# Altium PCB Quadruple_7_Seg_Disp.PcbDoc
Units mm, origin at the board's own origin, x right, y up, seen from the top; angles counter-clockwise.
Board outline 83.82 x 39.88 mm, 2 copper layers (Top Layer, Bottom Layer); 29 components, 37 nets, 137 pads, 0 vias.
Unrouted connection lines stored in the file: 64.
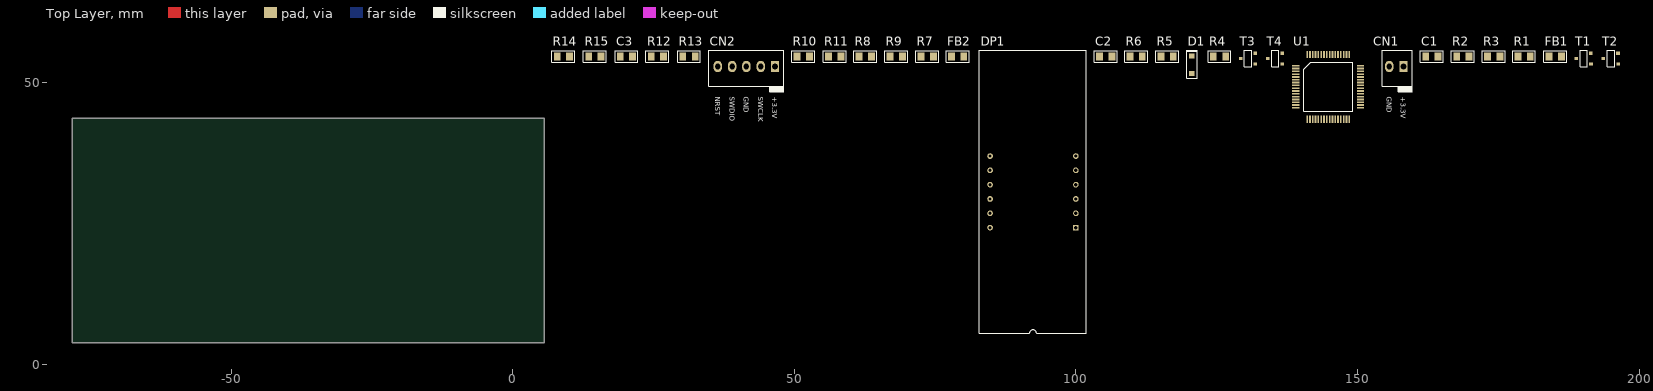
[diagram p0: Top Layer view]
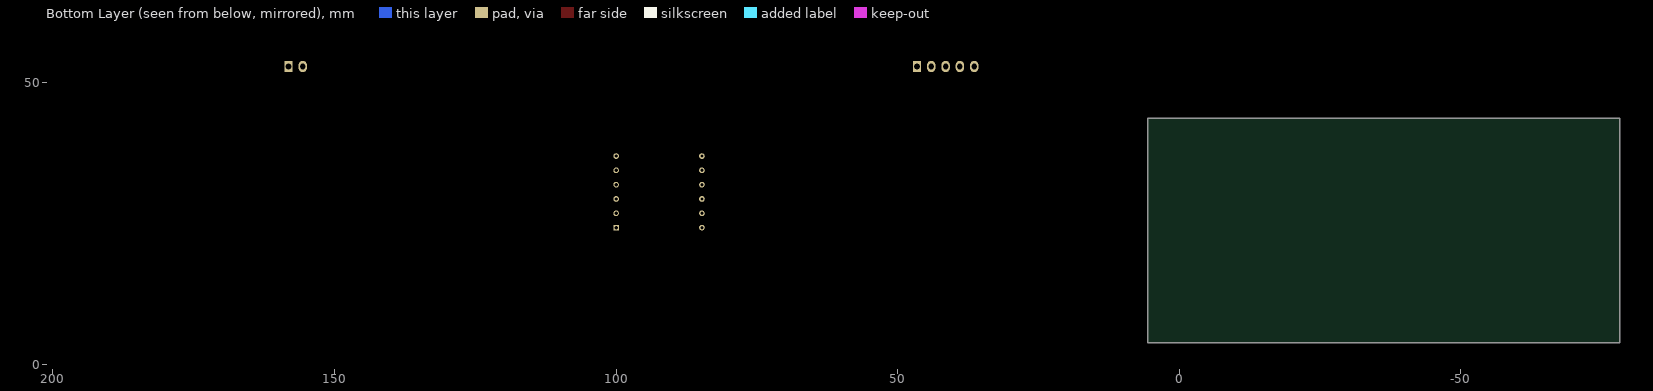
[diagram p1: Bottom Layer view, seen from below]

## Layer stack, top to bottom
Top Solder: solder mask 0.0102, Solder Resist, Dk 3.5
Top Layer: signal copper 0.0356
Dielectric 1: dielectric 0.32, FR-4, Dk 4.8
Bottom Layer: signal copper 0.0356
Bottom Solder: solder mask 0.0102, Solder Resist, Dk 3.5

## Board outline
5.6,3.823 5.6,43.701 -78.22,43.701 -78.22,3.823

## Design rules (kind name [scope] priority, off if disabled: settings)
Clearance [All] p1: gap=0.254 ignorepadtopadclearanceinfootprint=FALSE except(0: Arc-Hole Track-Hole SMDPad-Hole THPad-Hole Via-Hole Fill-Hole Poly-Hole Region-Hole Text-Hole)
PolygonConnect [All] p1: connectstyle=Relief reliefconductorwidth=0.254 reliefentries=4 polygonreliefangle="90 Angle" airgapwidth=0.254
RoutingVias [All] p1: holewidth=0.3 width=0.7 viastyle="Through Hole" minholewidth=0.3 minwidth=0.7 maxholewidth=0.3 maxwidth=0.7
SolderMaskExpansion [All] p1: expansion=0.102
Width [All] p1: maxlimit=1 minlimit=0.25 preferedwidth=0.5
30 further rules are at their usual default settings.

## Components (designator, comment, footprint, x,y, rotation, side; value= is the part's Value field where it differs from the comment)
C1 "100uF/50V" "Capacitor 0805" 163.199,54.678 r0 top
C2 "10nF/50V" "Capacitor 0805" 105.3,54.678 r0 top
C3 "4.7uF/16V" "Capacitor 0805 4.7uF" 20.2,54.678 r0 top
CN1 "PCMC2-02 - Alimentação +3V3" "Header Male Horizontal 2X1" 156.899,52.878 r0 top
CN2 "PCMC2-05 - Gravacao STM32" "Header Macho Horizontal 5x1 - Gravacao STM32" 41.5,52.878 r0 top
D1 "1N4148W-TP" SOD123 120.6,53.178 r90 top
DP1 "LDQ-N516RI" LDQ-N516RI 100,24.278 r90 top
FB1 "1A" "Ferrite 0805" 185.099,54.678 r0 top
FB2 "1A" "Ferrite 0805" 79,54.678 r0 top
R1 "100k" "RESISTOR 0805 100K" 179.599,54.678 r0 top
R2 "10k" "RESISTOR 0805 10K" 168.699,54.678 r0 top
R3 "10k" "RESISTOR 0805 10K" 174.199,54.678 r0 top
R4 "47K" "Resistor 0805 47k" 125.5,54.678 r0 top
R5 "10k" "RESISTOR 0805 10K" 116.2,54.678 r0 top
R6 "10k" "RESISTOR 0805 10K" 110.7,54.678 r0 top
R7 "220k" "Resistor 0805 220k" 73.6,54.678 r0 top
R8 "220R" "Resistor 0805 220R" 62.6,54.678 r0 top
R9 "220R" "Resistor 0805 220R" 68.1,54.678 r0 top
R10 "220R" "Resistor 0805 220R" 51.6,54.678 r0 top
R11 "220R" "Resistor 0805 220R" 57.2,54.678 r0 top
R12 "220R" "Resistor 0805 220R" 25.7,54.678 r0 top
R13 "220R" "Resistor 0805 220R" 31.3,54.678 r0 top
R14 "220R" "Resistor 0805 220R" 9,54.678 r0 top
R15 "220R" "Resistor 0805 220R" 14.6,54.678 r0 top
T1 "BC847" SOT-23 188.899,54.778 r0 top
T2 "BC847" SOT-23 193.699,54.778 r0 top
T3 "BC847" SOT-23 129.3,54.778 r0 top
T4 "BC847" SOT-23 134.1,54.778 r0 top
U1 "STM32F411RET6" LQFP64 144.799,49.278 r0 top

## Footprints (in the part's own frame and the unit in brackets; to place one, negate y for a bottom-side part, rotate by r counter-clockwise, add the part's x,y. Pads: shape width x height; smd on the part's side, far side on the other; paste and mask are expansions set on the pad)
"Capacitor 0805" [mm]
  rect 1.2x1.4 smd: 1(-1.1,0) 2(1.1,0)
  silkscreen extent -2.02,-1.02 2.02,1.02, body extent -1,-0.62 1,0.63, height 0.6
"Capacitor 0805 4.7uF" [mm]
  rect 1.2x1.4 smd: 1(-1.1,0) 2(1.1,0)
  silkscreen extent -2.02,-1.03 2.03,1.02, body extent -1.07,-0.7 1.13,0.75, height 1.4
"Ferrite 0805" [mm]
  rect 1.2x1.4 smd: 1(-1.1,0) 2(1.1,0)
  silkscreen extent -2.02,-1.02 2.02,1.02, body extent -1.28,-0.62 1.23,0.63, height 0.8
"Header Macho Horizontal 5x1 - Gravacao STM32" [mm] "Header Macho Horizontal 5x1 - Gravacao STM32"
  rect 1.5x2 hole 1: 1(5.08,0)
  oval 1.5x2 hole 1: 2(2.54,0) 3(0,0) 4(-2.54,0) 5(-5.08,0)
  silkscreen extent -6.65,-4.48 6.65,2.87, body extent -6.35,-3.2 6.35,2.6, height 11.53
"Header Male Horizontal 2X1" [mm]
  rect 1.5x2 hole 1: 1(1.27,0)
  oval 1.5x2 hole 1: 2(-1.27,0)
  silkscreen extent -2.54,-4.48 2.84,2.87, body extent -2.57,-3.2 2.51,2.6, height 11.6
LDQ-N516RI [mm]
  rect 1x1 hole 0.6: 1(0,0)
  round 1 hole 0.6: 2(2.54,0) 3(5.08,0) 4(7.62,0) 5(10.16,0) 6(12.7,0) 7(12.7,15.24) 8(10.16,15.24) 9(7.62,15.24) 10(5.08,15.24) 11(2.54,15.24) 12(0,15.24)
  silkscreen extent -18.8,-1.88 31.5,17.12, body extent -18.8,-1.88 31.5,17.12, height 8
LQFP64 [mm]
  rect 1.276x0.3 smd: 1(-5.75,3.75) 2(-5.75,3.25) 3(-5.75,2.75) 4(-5.75,2.25) 5(-5.75,1.75) 6(-5.75,1.25) 7(-5.75,0.75) 8(-5.75,0.25) 9(-5.75,-0.25) 10(-5.75,-0.75) 11(-5.75,-1.25) 12(-5.75,-1.75) 13(-5.75,-2.25) 14(-5.75,-2.75) 15(-5.75,-3.25) 16(-5.75,-3.75) 33(5.75,-3.75) 34(5.75,-3.25) 35(5.75,-2.75) 36(5.75,-2.25) 37(5.75,-1.75) 38(5.75,-1.25) 39(5.75,-0.75) 40(5.75,-0.25) 41(5.75,0.25) 42(5.75,0.75) 43(5.75,1.25) 44(5.75,1.75) 45(5.75,2.25) 46(5.75,2.75) 47(5.75,3.25) 48(5.75,3.75)
  rect 0.3x1.276 smd: 17(-3.75,-5.75) 18(-3.25,-5.75) 19(-2.75,-5.75) 20(-2.25,-5.75) 21(-1.75,-5.75) 22(-1.25,-5.75) 23(-0.75,-5.75) 24(-0.25,-5.75) 25(0.25,-5.75) 26(0.75,-5.75) 27(1.25,-5.75) 28(1.75,-5.75) 29(2.25,-5.75) 30(2.75,-5.75) 31(3.25,-5.75) 32(3.75,-5.75) 49(3.75,5.75) 50(3.25,5.75) 51(2.75,5.75) 52(2.25,5.75) 53(1.75,5.75) 54(1.25,5.75) 55(0.75,5.75) 56(0.25,5.75) 57(-0.25,5.75) 58(-0.75,5.75) 59(-1.25,5.75) 60(-1.75,5.75) 61(-2.25,5.75) 62(-2.75,5.75) 63(-3.25,5.75) 64(-3.75,5.75)
  silkscreen extent -4.31,-4.31 4.31,4.31, body extent -6.01,-6.01 5.99,5.99, height 8.6
"RESISTOR 0805 10K" [mm]
  rect 1.2x1.4 smd: 1(-1.1,0) 2(1.1,0)
  silkscreen extent -2.03,-1.02 2.02,1.02, body extent -0.97,-0.62 1.03,0.63, height 0.61
"Resistor 0805 47k" [mm]
  rect 1.2x1.4 smd: 1(-1.1,0) 2(1.1,0)
  silkscreen extent -2.02,-1.02 2.02,1.02, body extent -1,-0.62 1,0.63, height 0.51
"RESISTOR 0805 100K" [mm]
  rect 1.2x1.4 smd: 1(-1.125,0) 2(1.075,0)
  silkscreen extent -2.05,-1.02 2,1.03, body extent -1.03,-0.62 0.97,0.63, height 0.61
"Resistor 0805 220k" [mm]
  rect 1.2x1.4 smd: 1(-1.1,0) 2(1.1,0)
  silkscreen extent -2.02,-1.02 2.02,1.02, body extent -1,-0.62 1,0.63, height 0.51
"Resistor 0805 220R" [mm]
  rect 1.2x1.4 smd: 1(-1.1,0) 2(1.1,0)
  silkscreen extent -2.03,-1.03 2.02,1.02, body extent -1,-0.62 1,0.63, height 0.61
SOD123 [mm]
  rect 0.9x0.95 smd: 1(-1.575,0) 2(1.575,0)
  silkscreen extent -2.35,-0.95 2.6,0.95, body extent -1.85,-0.8 1.85,0.8, height 1.28
SOT-23 [mm]
  rect 0.65x0.55 smd: B(2.565,-1.422) C(-0.051,-0.508) E(2.54,0.457)
  silkscreen extent 0.64,-1.98 1.93,1.02, body extent 0.04,-1.98 2.54,1.02, height 1.09

## Part data
C1: library part CC0805MRX7R9BB104, "Cap Ceramic 0.1uF 50V X7R 20% SMD 0805 125C Paper T/R", Capacitance=100nF, Case/Package=0805, Dielectric=X7R, Manufacturer=Yageo, Max Operating Temperature=125°C, Min Operating Temperature=-55°C, Supplier Part Number 1=311-4351-1-ND, Tolerance=20%, Voltage Rating=50V, ComponentLink1Description=https://datasheet.ciiva.com/13207/upy-gphc-x7r-6-3v-to-50v-8-12304-13207535.pdf?src-supplier=Mouser, ComponentLink1URL=https://datasheet.ciiva.com/13207/upy-gphc-x7r-6-3v-to-50v-8-12304-13207535.pdf?src-supplier=Mouser, Depth=1.25mm, Halogen Free="Halogen Free", Lead Free="Lead Free", Length=0.079inch, Manufacturer Part Number=CC0805MRX7R9BB104, Mount="Surface Mount", Packaging="Tape and Reel", Pricing 1="1 = 0,16000, 10 = 0,11400, 50 = 0,06460, 100 = 0,05350, 500 = 0,03754, 1000 = 0,03108 (USD)", RoHS=Yes, Stock 1=3755, Supplier 1=Digi-Key, Thickness=0.037inch, Voltage Rating (DC)=50V, Width=0.049inch
C2: library part C0805X103F5GEC7210, "Cap Cer 0805 10NF 50V C0G 1%", Manufacturer=KEMET, Supplier Part Number 1=C0805X103F5GEC7210-ND, Manufacturer Part Number=C0805X103F5GEC7210, Pricing 1="10000 = 0,10290 (USD)", Stock 1=0, Supplier 1=Digi-Key
C3: library part C0805C475M4PACTU, "Multilayer Ceramic Capacitors MLCC - SMD/SMT 16volts 4.7uF X5R 20%", Capacitance=4.7uF, Case/Package=0805, Case Code (Metric)=2012, Dielectric=X5R, Dielectric Material=Ceramic, Manufacturer=KEMET, Max Operating Temperature=85°C, Min Operating Temperature=-55°C, Package Quantity=1, Supplier Part Number 1=399-9249-1-ND, Tolerance=20%, Voltage Rating=16V, Case Code (Imperial)=0805, ComponentLink1Description=http://components.arrow.com/part/dataview/40912695S6999520N7429?src-supplier=Arrow, ComponentLink1URL=http://components.arrow.com/part/dataview/40912695S6999520N7429?src-supplier=Arrow, ComponentLink2Description=http://www.mouser.com/ds/2/212/KEM_C1006_X5R_SMD-1103249.pdf?src-supplier=Mouser, ComponentLink2URL=http://www.mouser.com/ds/2/212/KEM_C1006_X5R_SMD-1103249.pdf?src-supplier=Mouser, ComponentLink3Description=https://search.kemet.com/component-edge/download/datasheet/C0805C475M4PACTU.pdf?src-supplier=Digi-Key, ComponentLink3URL=https://search.kemet.com/component-edge/download/datasheet/C0805C475M4PACTU.pdf?src-supplier=Digi-Key, ComponentLink4Description=https://api.kemet.com/component-edge/download/datasheet/C0805C475M4PACTU.pdf?src-supplier=Digi-Key, ComponentLink4URL=https://api.kemet.com/component-edge/download/datasheet/C0805C475M4PACTU.pdf?src-supplier=Digi-Key, Depth=1.25mm, Dissipation Factor=5%, Height=1.25mm, Lead Free="Lead Free", Lead Pitch=0.75mm, Length=2mm, Manufacturer Part Number=C0805C475M4PACTU, Mount="Surface Mount", Packaging="Tape and Reel", Pricing 1="1 = 0,54000, 10 = 0,37800, 50 = 0,26460, 100 = 0,22690, 500 = 0,17016, 1000 = 0,14369 (USD)", RoHS=Yes, Stock 1=4513, Supplier 1=Digi-Key, Termination=SMD/SMT, Thickness=0.055inch, Voltage Rating (DC)=16V, Width=0.049inch
D1: "MICRO COMMERCIAL COMPONENTS - 1N4148W-TP - SWITCHING DIODE, 150mA, 100V, SOD123, FU", Average Rectified Current=150mA, Capacitance=4pF, Forward Voltage=1V, Manufacturer=MCC, Max Forward Surge Current (Ifsm)=1A, Max Operating Temperature=150°C, Max Repetitive Reverse Voltage (Vrrm)=100V, Max Reverse Leakage Current=5uA, Max Surge Current=2A, Min Operating Temperature=-65°C, Package Quantity=3000, Power Dissipation=400mW, Supplier Part Number 1=1N4148WTPMSCT-ND, ComponentLink1Description=https://datasheet.ciiva.com/16836/1n4148wsod123-16836277.pdf?src-supplier=Future+Electronics, ComponentLink1URL=https://datasheet.ciiva.com/16836/1n4148wsod123-16836277.pdf?src-supplier=Future+Electronics, ComponentLink2Description=https://datasheet.ciiva.com/1243/1684829-1243908.pdf?src-supplier=Newark, ComponentLink2URL=https://datasheet.ciiva.com/1243/1684829-1243908.pdf?src-supplier=Newark, ComponentLink3Description=https://datasheet.ciiva.com/4435/1n4148wsod123-48460-4435223.pdf?src-supplier=Mouser, ComponentLink3URL=https://datasheet.ciiva.com/4435/1n4148wsod123-48460-4435223.pdf?src-supplier=Mouser, ComponentLink4Description=https://datasheet.ciiva.com/911/1n4148wsod123-911676.pdf?src-supplier=Digi-Key, ComponentLink4URL=https://datasheet.ciiva.com/911/1n4148wsod123-911676.pdf?src-supplier=Digi-Key, ComponentLink5Description=https://datasheet.ciiva.com/911/1n4148wsod123-911677.pdf?src-supplier=Digi-Key, ComponentLink5URL=https://datasheet.ciiva.com/911/1n4148wsod123-911677.pdf?src-supplier=Digi-Key, ComponentLink6Description=https://datasheet.ciiva.com/22747/1684829-22747439.pdf?src-supplier=Element14, ComponentLink6URL=https://datasheet.ciiva.com/22747/1684829-22747439.pdf?src-supplier=Element14, ComponentLink7Description=https://datasheet.ciiva.com/14557/70055519-14557767.pdf?src-supplier=Allied+Electronics, ComponentLink7URL=https://datasheet.ciiva.com/14557/70055519-14557767.pdf?src-supplier=Allied+Electronics, ComponentLink8Description=https://datasheet.ciiva.com/7622/1684829-7622556.pdf?src-supplier=Element14, ComponentLink8URL=https://datasheet.ciiva.com/7622/1684829-7622556.pdf?src-supplier=Element14, ComponentLink9Description=https://datasheet.ciiva.com/911/1n4148wsod123-911678.pdf?src-supplier=Digi-Key, ComponentLink9URL=https://datasheet.ciiva.com/911/1n4148wsod123-911678.pdf?src-supplier=Digi-Key, ComponentLink10Description=http://datasheet.octopart.com/1N4148W-TP-Micro-Commercial-datasheet-60845.pdf?src-supplier=Element14, ComponentLink10URL=http://datasheet.octopart.com/1N4148W-TP-Micro-Commercial-datasheet-60845.pdf?src-supplier=Element14, ComponentLink11Description=http://datasheet.octopart.com/1N4148W-TP-Micro-Commercial-datasheet-13551187.pdf?src-supplier=Upverter, ComponentLink11URL=http://datasheet.octopart.com/1N4148W-TP-Micro-Commercial-datasheet-13551187.pdf?src-supplier=Upverter, ComponentLink12Description=http://datasheet.octopart.com/1N4148W-TP-MCC-datasheet-8327246.pdf?src-supplier=Future+Electronics, ComponentLink12URL=http://datasheet.octopart.com/1N4148W-TP-MCC-datasheet-8327246.pdf?src-supplier=Future+Electronics, ComponentLink13Description=http://datasheet.octopart.com/1N4148W-TP-MCC-datasheet-124568.pdf?src-supplier=Future+Electronics, ComponentLink13URL=http://datasheet.octopart.com/1N4148W-TP-MCC-datasheet-124568.pdf?src-supplier=Future+Electronics, ComponentLink14Description=http://datasheet.octopart.com/1N4148W-TP-MCC-datasheet-10003094.pdf?src-supplier=Allied+Electronics, ComponentLink14URL=http://datasheet.octopart.com/1N4148W-TP-MCC-datasheet-10003094.pdf?src-supplier=Allied+Electronics, ComponentLink15Description=http://datasheet.octopart.com/1N4148W-TP-Micro-Commercial-datasheet-11773887.pdf?src-supplier=Arrow, ComponentLink15URL=http://datasheet.octopart.com/1N4148W-TP-Micro-Commercial-datasheet-11773887.pdf?src-supplier=Arrow, ComponentLink16Description=http://datasheet.octopart.com/1N4148W-TP-MCC-datasheet-133511570.pdf?src-supplier=Future+Electronics, ComponentLink16URL=http://datasheet.octopart.com/1N4148W-TP-MCC-datasheet-133511570.pdf?src-supplier=Future+Electronics, ComponentLink17Description=http://datasheet.octopart.com/1N4148W-TP-MCC-datasheet-134792309.pdf?src-supplier=TME, ComponentLink17URL=http://datasheet.octopart.com/1N4148W-TP-MCC-datasheet-134792309.pdf?src-supplier=TME, Current Rating=150mA, Element Configuration=Single, Forward Current=150mA, Height=1.2mm, Lead Free="Lead Free", Length=2.85mm, Manufacturer Part Number=1N4148W-TP, Max Reverse Voltage (DC)=100V, Mount="Surface Mount", Number of Pins=2, Output Current=150mA, Packaging="Tape and Reel", Peak Non-Repetitive Surge Current=2A, Polarity=Standard, Pricing 1="1 = 0,17000, 10 = 0,15800, 25 = 0,15000, 100 = 0,06600, 250 = 0,06336, 500 = 0,05184, 1000 = 0,03600 (USD)", Radiation Hardening=No, REACH SVHC=Unknown, Recovery Time=4ns, Reverse Recovery Time=4ns, Stock 1=11901, Supplier 1=Digi-Key, Voltage Rating (DC)=100V, Width=1.8mm
DP1: "DISPLAY, 7 SEGMENT, RED, 14MM", Color=Red, Forward Current=30mA, Forward Voltage=1.8V, Manufacturer=Lumex, Max Operating Temperature=85°C, Max Power Dissipation=100mW, Min Operating Temperature=-20°C, Package Quantity=10, Supplier Part Number 1=67-1450-ND, Test Current=10mA, ComponentLink1Description=https://datasheet.ciiva.com/1316/269248-1316417.pdf?src-supplier=Newark, ComponentLink1URL=https://datasheet.ciiva.com/1316/269248-1316417.pdf?src-supplier=Newark, ComponentLink2Description=https://datasheet.ciiva.com/2103/ldq-n516ri-2103905.pdf?src-supplier=Digi-Key, ComponentLink2URL=https://datasheet.ciiva.com/2103/ldq-n516ri-2103905.pdf?src-supplier=Digi-Key, ComponentLink3Description=https://datasheet.ciiva.com/4421/ldq-n516ri-107399-4421791.pdf?src-supplier=Mouser, ComponentLink3URL=https://datasheet.ciiva.com/4421/ldq-n516ri-107399-4421791.pdf?src-supplier=Mouser, ComponentLink4Description=https://datasheet.ciiva.com/1230/269248-1230278.pdf?src-supplier=Element14, ComponentLink4URL=https://datasheet.ciiva.com/1230/269248-1230278.pdf?src-supplier=Element14, Element Configuration="Common Cathode", Height=0.25inch, Illumination Color=Red, Lead Free="Lead Free", Length=0.25inch, Luminous Intensity=13.3mcd, Manufacturer Part Number=LDQ-N516RI, Number of Pins=12, Operating Supply Voltage=1.8V, Power Consumption=100mW, Pricing 1="1 = 6,73000, 10 = 6,09600, 100 = 4,06400, 500 = 3,49250, 1000 = 3,30200, 2500 = 3,22580, 5000 = 3,17500, 10000 = 3,11150, 25000 = 3,09880 (USD)", REACH SVHC=Unknown, RoHS=Yes, Stock 1=1635, Supplier 1=Digi-Key, Wavelength=660nm, Weight=0.0025lb, Width=0.25inch
FB1 FB2: library part "Bead 1A 0805", "FERRITE BEAD 0805 1LN", Case/Package=0805, DC Resistance (DCR)=300mR, Manufacturer=Fair-Rite, Manufacturer Part Number=2508051027Y1, Max Operating Temperature=125°C, Min Operating Temperature=-55°C, Package Quantity=4000, Supplier Part Number 1=1934-1009-1-ND, Test Frequency=100MHz, Tolerance=25%, ComponentLink1Description=https://datasheet.ciiva.com/3855/9132508051027y1-3855886.pdf?src-supplier=Arrow, ComponentLink1URL=https://datasheet.ciiva.com/3855/9132508051027y1-3855886.pdf?src-supplier=Arrow, Height=0.9mm, Impedance=1kR, Length=2mm, Max DC Current=1A, Packaging="Tape and Reel", Pricing 1="1 = 0,10000, 10 = 0,06100, 25 = 0,05440, 50 = 0,04960, 100 = 0,04460, 250 = 0,03268, 500 = 0,02376, 1000 = 0,02327 (USD)", RoHS=Yes, Stock 1=27360, Supplier 1=Digi-Key, Termination=SMD/SMT, Width=1.25mm
R1: library part RC0805JR-07100KL, "Res Thick Film 0805 100K Ohm 5% 1/8W 100ppm/C Molded SMD SMD Paper T/R", Case/Package=0805, Case Code (Metric)=2012, Manufacturer=Yageo, Max Operating Temperature=155°C, Min Operating Temperature=-55°C, Power Rating=125mW, Resistance=100kR, Supplier Part Number 1=311-100KARCT-ND, Temperature Coefficient=100ppm/°C, Tolerance=5%, Voltage Rating=150V, Case Code (Imperial)=0805, ComponentLink1Description=https://datasheet.ciiva.com/7941/442941-7941864.pdf?src-supplier=Element14, ComponentLink1URL=https://datasheet.ciiva.com/7941/442941-7941864.pdf?src-supplier=Element14, ComponentLink2Description=https://datasheet.ciiva.com/7941/442941-7941865.pdf?src-supplier=Element14, ComponentLink2URL=https://datasheet.ciiva.com/7941/442941-7941865.pdf?src-supplier=Element14, ComponentLink3Description=https://datasheet.ciiva.com/15190/getdatasheetpartid-479267-15190029.pdf?src-supplier=Verical, ComponentLink3URL=https://datasheet.ciiva.com/15190/getdatasheetpartid-479267-15190029.pdf?src-supplier=Verical, Composition="Thick Film", Contact Plating=Tin,Matte,Lead, Depth=1.25mm, Lead Free="Lead Free", Length=2mm, Manufacturer Part Number=RC0805JR-07100KL, Military Standard=Not, Packaging="Tape and Reel", Pricing 1="1 = 0,10000, 10 = 0,03500, 100 = 0,01400, 1000 = 0,00631, 2500 = 0,00548 (USD)", Radiation Hardening=No, REACH SVHC=Unknown, RoHS=Yes, Stock 1=2684406, Supplier 1=Digi-Key, Termination=SMD/SMT
R2 R3 R5 R6: library part RC0805JR-0710KL, "YAGEO - RC0805JR-0710KL - RES, 10K, 5%, 0.125W, 0805, THICK FILM", Case/Package=0805, Case Code (Metric)=2012, Manufacturer=Yageo, Max Operating Temperature=155°C, Min Operating Temperature=-55°C, Power Rating=125mW, Resistance=10kR, Supplier Part Number 1=311-10KARCT-ND, Temperature Coefficient=100ppm/°C, Tolerance=5%, Voltage Rating=150V, Case Code (Imperial)=0805, ComponentLink1Description=https://datasheet.ciiva.com/7941/444164-7941871.pdf?src-supplier=Element14, ComponentLink1URL=https://datasheet.ciiva.com/7941/444164-7941871.pdf?src-supplier=Element14, ComponentLink2Description=https://datasheet.ciiva.com/7983/444164-7983765.pdf?src-supplier=Element14, ComponentLink2URL=https://datasheet.ciiva.com/7983/444164-7983765.pdf?src-supplier=Element14, ComponentLink3Description=https://datasheet.ciiva.com/7941/444164-7941870.pdf?src-supplier=Element14, ComponentLink3URL=https://datasheet.ciiva.com/7941/444164-7941870.pdf?src-supplier=Element14, Composition="Thick Film", Contact Plating=Tin,Matte, Depth=1.25mm, Height=0.5mm, Lead Free="Lead Free", Length=2mm, Manufacturer Part Number=RC0805JR-0710KL, Military Standard=Not, Packaging="Tape and Reel", Pricing 1="1 = 0,10000, 10 = 0,03500, 100 = 0,01400, 1000 = 0,00631, 2500 = 0,00548 (USD)", Radiation Hardening=No, REACH SVHC=Unknown, RoHS=Yes, Stock 1=9991822, Supplier 1=Digi-Key, Termination=SMD/SMT, Width=1.25mm
R4: library part RC0805JR-0747KL, "YAGEO (PHYCOMP)   RC0805JR-0747KL   Surface Mount Chip Resistor, Thick Film, RC Series, 47 kohm, 125 mW,  5%, 150 V", Case/Package=0805, Case Code (Metric)=2012, Manufacturer=Yageo, Max Operating Temperature=155°C, Min Operating Temperature=-55°C, Power Rating=125mW, Resistance=47kR, Supplier Part Number 1=311-47KARCT-ND, Temperature Coefficient=100ppm/°C, Tolerance=5%, Voltage Rating=150V, Case Code (Imperial)=0805, ComponentLink1Description=https://datasheet.ciiva.com/7941/442941-7941967.pdf?src-supplier=Element14, ComponentLink1URL=https://datasheet.ciiva.com/7941/442941-7941967.pdf?src-supplier=Element14, ComponentLink2Description=https://datasheet.ciiva.com/17200/rc0805-17200744.pdf?src-supplier=Future+Electronics, ComponentLink2URL=https://datasheet.ciiva.com/17200/rc0805-17200744.pdf?src-supplier=Future+Electronics, Composition="Thick Film", Contact Plating=Tin,Lead,Matte, Depth=1.25mm, Lead Free="Lead Free", Length=2mm, Manufacturer Part Number=RC0805JR-0747KL, Military Standard=Not, Packaging="Tape and Reel", Pricing 1="1 = 0,10000, 10 = 0,03500, 100 = 0,01400, 1000 = 0,00631, 2500 = 0,00548 (USD)", Radiation Hardening=No, REACH SVHC=Unknown, RoHS=Yes, Stock 1=972470, Supplier 1=Digi-Key, Termination=SMD/SMT
R7: library part RC0805JR-07220KL, "YAGEO - RC0805JR-07220KL - RES, 220K, 5%, 0.125W, 0805, THICK FILM", Case/Package=0805, Case Code (Metric)=2012, Manufacturer=Yageo, Max Operating Temperature=155°C, Max Power Dissipation=125mW, Min Operating Temperature=-55°C, Package Quantity=1, Resistance=220kR, Supplier Part Number 1=311-220KARCT-ND, Temperature Coefficient=100ppm/°C, Tolerance=5%, Voltage Rating=150V, Case Code (Imperial)=0805, ComponentLink1Description=https://datasheet.ciiva.com/5925/442941-5925072.pdf?src-supplier=Farnell, ComponentLink1URL=https://datasheet.ciiva.com/5925/442941-5925072.pdf?src-supplier=Farnell, ComponentLink2Description=https://datasheet.ciiva.com/2456/pyu-r-int-thick-7-2456369.pdf?src-supplier=Digi-Key, ComponentLink2URL=https://datasheet.ciiva.com/2456/pyu-r-int-thick-7-2456369.pdf?src-supplier=Digi-Key, ComponentLink3Description=https://datasheet.ciiva.com/2456/pyu-r-int-thick-7-2456370.pdf?src-supplier=Digi-Key, ComponentLink3URL=https://datasheet.ciiva.com/2456/pyu-r-int-thick-7-2456370.pdf?src-supplier=Digi-Key, ComponentLink4Description=https://datasheet.ciiva.com/2456/pyu-r-int-thick-7-2456371.pdf?src-supplier=Digi-Key, ComponentLink4URL=https://datasheet.ciiva.com/2456/pyu-r-int-thick-7-2456371.pdf?src-supplier=Digi-Key, ComponentLink5Description=https://datasheet.ciiva.com/16741/rc0805-16741415.pdf?src-supplier=Future+Electronics, ComponentLink5URL=https://datasheet.ciiva.com/16741/rc0805-16741415.pdf?src-supplier=Future+Electronics, ComponentLink6Description=https://datasheet.ciiva.com/7941/442941-7941915.pdf?src-supplier=Element14, ComponentLink6URL=https://datasheet.ciiva.com/7941/442941-7941915.pdf?src-supplier=Element14, ComponentLink7Description=https://datasheet.ciiva.com/7941/442941-7941916.pdf?src-supplier=Element14, ComponentLink7URL=https://datasheet.ciiva.com/7941/442941-7941916.pdf?src-supplier=Element14, Composition="Thick Film", Contact Plating=Tin,Matte,Lead, Depth=1.25mm, Features="Moisture Resistant", Height=0.024inch, Lead Free="Lead Free", Length=2mm, Manufacturer Part Number=RC0805JR-07220KL, Military Standard=Not, Number of Terminations=2, Packaging="Tape and Reel", Power Rating=125mW, Pricing 1="1 = 0,10000, 10 = 0,03500, 100 = 0,01400, 1000 = 0,00631, 2500 = 0,00548 (USD)", Radiation Hardening=No, REACH SVHC=Unknown, RoHS=Yes, Stock 1=367499, Supplier 1=Digi-Key, Termination=SMD/SMT, Width=0.049inch, Working Voltage=150V
R8 R9 R10 R11 R12 R13 R14 R15: library part RC0805JR-07220RL, "Res General Purpose Thick Film 0805 220 Ohm 5% 1/8W ±100ppm/°C Molded SMD Paper T/R", Case/Package=0805, Case Code (Metric)=2012, Manufacturer=Yageo, Max Operating Temperature=155°C, Min Operating Temperature=-55°C, Power Rating=125mW, Supplier Part Number 1=311-220ARCT-ND, Temperature Coefficient=100ppm/°C, Tolerance=5%, Voltage Rating=150V, Case Code (Imperial)=0805, ComponentLink1Description=https://datasheet.ciiva.com/16914/rc0805-16914046.pdf?src-supplier=Future+Electronics, ComponentLink1URL=https://datasheet.ciiva.com/16914/rc0805-16914046.pdf?src-supplier=Future+Electronics, ComponentLink2Description=https://datasheet.ciiva.com/7941/442941-7941917.pdf?src-supplier=Element14, ComponentLink2URL=https://datasheet.ciiva.com/7941/442941-7941917.pdf?src-supplier=Element14, ComponentLink3Description=https://datasheet.ciiva.com/7941/442941-7941918.pdf?src-supplier=Element14, ComponentLink3URL=https://datasheet.ciiva.com/7941/442941-7941918.pdf?src-supplier=Element14, Composition="Thick Film", Contact Plating=Tin,Matte,Lead, Depth=1.25mm, Lead Free="Lead Free", Length=2mm, Manufacturer Part Number=RC0805JR-07220RL, Military Standard=Not, Packaging="Tape and Reel", Pricing 1="1 = 0,10000, 10 = 0,03500, 100 = 0,01400, 1000 = 0,00631, 2500 = 0,00548 (USD)", Radiation Hardening=No, REACH SVHC=Unknown, Resistance=220R, RoHS=Yes, Stock 1=890574, Supplier 1=Digi-Key, Termination=SMD/SMT
T1 T2 T3 T4: library part BC847C-13-F, "Trans GP BJT NPN 45V 0.1A 350mW Automotive 3-Pin SOT-23 T/R", Case/Package=SOT-23, Collector Base Voltage (VCBO)=50V, Collector Emitter Breakdown Voltage=45V, Emitter Base Voltage (VEBO)=6V, Frequency=300MHz, Manufacturer=Diodes, Max Collector Current=100mA, Max Operating Temperature=150°C, Max Power Dissipation=310mW, Min Operating Temperature=-65°C, Package Quantity=10000, Power Dissipation=350mW, Supplier Part Number 1=BC847C-13-FDICT-ND, Collector Emitter Voltage (VCEO)=45V, ComponentLink1Description=http://components.arrow.com/part/dataview/50855856S8619087N2867?src-supplier=Arrow, ComponentLink1URL=http://components.arrow.com/part/dataview/50855856S8619087N2867?src-supplier=Arrow, ComponentLink2Description=http://components.arrow.com/part/dataview/0323_01117098?src-supplier=Arrow+Europe, ComponentLink2URL=http://components.arrow.com/part/dataview/0323_01117098?src-supplier=Arrow+Europe, ComponentLink3Description=http://www.mouser.com/ds/2/115/ds11108-8549.pdf?src-supplier=Mouser, ComponentLink3URL=http://www.mouser.com/ds/2/115/ds11108-8549.pdf?src-supplier=Mouser, ComponentLink4Description=https://www.diodes.com/assets/Datasheets/ds11108.pdf?src-supplier=Digi-Key, ComponentLink4URL=https://www.diodes.com/assets/Datasheets/ds11108.pdf?src-supplier=Digi-Key, ComponentLink5Description=http://www.diodes.com/datasheets/ds11108.pdf?src-supplier=Avnet, ComponentLink5URL=http://www.diodes.com/datasheets/ds11108.pdf?src-supplier=Avnet, ComponentLink6Description=http://www.diodes.com/datasheets/ds11108.pdf?src-supplier=Avnet+Europe, ComponentLink6URL=http://www.diodes.com/datasheets/ds11108.pdf?src-supplier=Avnet+Europe, Contact Plating=Tin,Matte, Manufacturer Part Number=BC847C-13-F, Mount="Surface Mount", Number of Elements=1, Number of Pins=3, Packaging="Tape and Reel", Polarity=NPN, Pricing 1="1 = 0,19000, 10 = 0,17200, 25 = 0,16400, 100 = 0,07220, 250 = 0,06932, 500 = 0,05672, 1000 = 0,03939, 2500 = 0,03440, 5000 = 0,03086 (USD)", REACH SVHC="No SVHC", RoHS=Yes, Stock 1=14218, Supplier 1=Digi-Key, Transition Frequency=300MHz
U1: "IC MCU 32BIT 512KB FLASH 64LQFP", Case/Package=LQFP, Frequency=100MHz, Manufacturer=STMicroelectronics, Max Operating Temperature=85°C, Max Power Dissipation=313mW, Max Supply Voltage=3.6V, Min Operating Temperature=-40°C, Min Supply Voltage=1.7V, Operating Supply Voltage=3.3V, Package Quantity=960, Supplier Part Number 1=497-14909-ND, ComponentLink1Description=http://www.mouser.com/ds/2/389/stm32f411ce-956237.pdf?src-supplier=Mouser, ComponentLink1URL=http://www.mouser.com/ds/2/389/stm32f411ce-956237.pdf?src-supplier=Mouser, ComponentLink2Description=http://www.farnell.com/datasheets/1941006.pdf?src-supplier=Farnell, ComponentLink2URL=http://www.farnell.com/datasheets/1941006.pdf?src-supplier=Farnell, ComponentLink3Description=http://www.st.com/st-web-ui/static/active/en/resource/technical/document/datasheet/DM00115249.pdf?src-supplier=Avnet, ComponentLink3URL=http://www.st.com/st-web-ui/static/active/en/resource/technical/document/datasheet/DM00115249.pdf?src-supplier=Avnet, ComponentLink4Description=http://www.st.com/content/ccc/resource/technical/document/datasheet/b3/a5/46/3b/b4/e5/4c/85/DM00115249.pdf/files/DM00115249.pdf/jcr:content/translations/en.DM00115249.pdf?src-supplier=Digi-Key, ComponentLink4URL=http://www.st.com/content/ccc/resource/technical/document/datasheet/b3/a5/46/3b/b4/e5/4c/85/DM00115249.pdf/files/DM00115249.pdf/jcr:content/translations/en.DM00115249.pdf?src-supplier=Digi-Key, ComponentLink5Description=http://www.farnell.com/datasheets/1941006.pdf?src-supplier=Newark, ComponentLink5URL=http://www.farnell.com/datasheets/1941006.pdf?src-supplier=Newark, ComponentLink6Description=http://www.farnell.com/datasheets/1869644.pdf?src-supplier=Element14, ComponentLink6URL=http://www.farnell.com/datasheets/1869644.pdf?src-supplier=Element14, Core Architecture=ARM, Data Bus Width=32b, Interface=I2C,SPI,USB,IrDA,MMC,SDIO,SD,UART,USART,LIN,I2S, Lead Free="Lead Free", Length=10mm, Manufacturer Part Number=STM32F411RET6, Max Frequency=100MHz, Memory Size=512KB, Memory Type=FLASH, Mount="Surface Mount", Number of ADC Channels=16, Number of I/Os=50, Number of Pins=64, Number of Programmable I/O=50, Number of Timers/Counters=8, Oscillator Type=Internal, Packaging=Tray, Peripherals="Brown-out Detect/Reset,POR,PWM,WDT,DMA", Pricing 1="1 = 6,81000, 10 = 6,15600, 25 = 5,87000, 100 = 5,09690, 250 = 4,86780, 500 = 4,43828, 1000 = 3,86559, 2500 = 3,72242, 5000 = 3,57925 (USD)", Radiation Hardening=No, RAM Size=128KB, REACH SVHC="No SVHC", RoHS=Yes, Stock 1=5414, Supplier 1=Digi-Key, Watchdog Timer=Yes, Weight=0.012088oz, Width=10mm

## Nets (pads, with @x,y where several pads share a name; then routed paths per layer and width w, separated by ;. In a path a pad name is that pad's centre, name@x,y a point inside that pad or via, vN(x,y) a via of type N, cw(c..) or ccw(c..) an arc to the next point about the centre after c; other vN are vias at no path point)
+3V3: CN1.1 D1.2 FB1.2 FB2.2 R4.2 R7.2
DP: R9.1 U1.23
GND: C1.1 C2.1 C3.1 CN1.2 CN2.3 R1.2 T1.E T2.E T3.E T4.E U1.12 U1.18 U1.31 U1.47 U1.63
NetC3_2: C3.2 U1.30
NetCN2_1: CN2.1 FB2.1
NetDP1_1: DP1.1 R15.2
NetDP1_2: DP1.2 R14.2
NetDP1_3: DP1.3 R9.2
NetDP1_4: DP1.4 R12.2
NetDP1_5: DP1.5 R11.2
NetDP1_6: DP1.6 T3.C
NetDP1_7: DP1.7 R10.2
NetDP1_8: DP1.8 T1.C
NetDP1_9: DP1.9 T2.C
NetDP1_10: DP1.10 R13.2
NetDP1_11: DP1.11 R8.2
NetDP1_12: DP1.12 T4.C
NetR1_1: R1.1 U1.60
NetR2_1: R2.1 U1.55
NetR2_2: R2.2 T1.B
NetR3_1: R3.1 U1.57
NetR3_2: R3.2 T2.B
NetR5_1: R5.1 U1.56
NetR5_2: R5.2 T4.B
NetR6_1: R6.1 U1.43
NetR6_2: R6.2 T3.B
NRST: C2.2 CN2.5 D1.1 R4.1 U1.7
SEG_A: R8.1 U1.8
SEG_B: R10.1 U1.9
SEG_C: R12.1 U1.26
SEG_D: R14.1 U1.58
SEG_E: R15.1 U1.14
SEG_F: R13.1 U1.15
SEG_G: R11.1 U1.42
SWCLK: CN2.2 U1.49
SWDIO: CN2.4 R7.1 U1.46
VDD: C1.2 FB1.1 U1.1 U1.13 U1.19 U1.32 U1.48 U1.64
pads on no net: U1.2 U1.3 U1.4 U1.5 U1.6 U1.10 U1.11 U1.16 U1.17 U1.20 U1.21 U1.22 U1.24 U1.25 U1.27 U1.28 U1.29 U1.33 U1.34 U1.35 U1.36 U1.37 U1.38 U1.39 U1.40 U1.41 U1.44 U1.45 U1.50 U1.51 U1.52 U1.53 U1.54 U1.59 U1.61 U1.62

## Text inside footprints (layer, text, board x,y; h text height)
CN1: Top Overlay "GND" at 155.172,47.519 h0.91 r270; Top Overlay "+3.3V" at 157.712,47.519 h0.91 r270
CN2: Top Overlay "+3.3V" at 46.123,47.519 h0.91 r270; Top Overlay "SWCLK" at 43.583,47.519 h0.91 r270; Top Overlay "SWDIO" at 38.503,47.519 h0.91 r270; Top Overlay "NRST" at 35.963,47.519 h0.91 r270; Top Overlay "GND" at 41.043,47.519 h0.91 r270